# EAGLE board CT_schematic (EAGLE 7.6.0)

Size 100 x 80 mm. Coordinates in mm from the lower left corner, seen from the top.
Outline: 0,0 100,0 100,80 0,80 0,0
Copper layers (1*16): Top 0.035mm / dielectric 1.5mm / Bottom 0.035mm
Design rules "default": minimum track width 10mil, minimum drill 24mil, track to track 8mil, track to pad 8mil, pad to pad 8mil, via to via 8mil, smd to smd 8mil, copper to edge 40mil, drill to drill 8mil, minimum pad ring 10mil, minimum via ring 8mil, stop-mask expansion 4mil, vias tented up to drill 0mil, thermal gap 10mil

## Footprints (pad centres in the part's own frame; a part is rotated, then mirrored left to right if it is on the bottom)
C0603 = smd 0.8 x 0.8: 1 -0.762,0; 2 0.762,0
C0402 = smd 0.5 x 0.5: 1 -0.508,0; 2 0.508,0
C0805 = smd 1.2 x 1.3: 1 -1.016,0; 2 1.016,0
C1206 = smd 1.3 x 1.6: 1 -1.524,0; 2 1.524,0
L0603 = smd 0.8 x 0.8: 1 -0.762,0; 2 0.762,0
DR1040 = smd 1.6 x 3.2: 1 -4.458,0; 2 4.458,0
R0603 = smd 0.8 x 0.8: 1 -0.762,0; 2 0.762,0
UFBGA100 = smd 0.28 x 0.28: A1 -2.75,2.75; A2 -2.25,2.75; A3 -1.75,2.75; A4 -1.25,2.75; A5 -0.75,2.75; A6 -0.25,2.75; A7 0.25,2.75; A8 0.75,2.75; A9 1.25,2.75; A10 1.75,2.75; A11 2.25,2.75; A12 2.75,2.75; B1 -2.75,2.25; B2 -2.25,2.25; B3 -1.75,2.25; B4 -1.25,2.25; B5 -0.75,2.25; B6 -0.25,2.25; B7 0.25,2.25; B8 0.75,2.25; B9 1.25,2.25; B10 1.75,2.25; B11 2.25,2.25; B12 2.75,2.25; C1 -2.75,1.75; C2 -2.25,1.75; C3 -1.75,1.75; C4 -1.25,1.75; C5 -0.75,1.75; C8 0.75,1.75; C9 1.25,1.75; C10 1.75,1.75; C11 2.25,1.75; C12 2.75,1.75; D1 -2.75,1.25; D2 -2.25,1.25; D3 -1.75,1.25; D10 1.75,1.25; D11 2.25,1.25; D12 2.75,1.25; E1 -2.75,0.75; E2 -2.25,0.75; E3 -1.75,0.75; E10 1.75,0.75; E11 2.25,0.75; E12 2.75,0.75; F1 -2.75,0.25; F2 -2.25,0.25; F11 2.25,0.25; F12 2.75,0.25; G1 -2.75,-0.25; G2 -2.25,-0.25; G11 2.25,-0.25; G12 2.75,-0.25; H1 -2.75,-0.75; H2 -2.25,-0.75; H3 -1.75,-0.75; H10 1.75,-0.75; H11 2.25,-0.75; H12 2.75,-0.75; J1 -2.75,-1.25; J2 -2.25,-1.25; J3 -1.75,-1.25; J10 1.75,-1.25; J11 2.25,-1.25; J12 2.75,-1.25; K1 -2.75,-1.75; K2 -2.25,-1.75; K3 -1.75,-1.75; K4 -1.25,-1.75; K5 -0.75,-1.75; K8 0.75,-1.75; K9 1.25,-1.75; K10 1.75,-1.75; K11 2.25,-1.75; K12 2.75,-1.75; L1 -2.75,-2.25; L2 -2.25,-2.25; L3 -1.75,-2.25; L4 -1.25,-2.25; L5 -0.75,-2.25; L6 -0.25,-2.25; L7 0.25,-2.25; L8 0.75,-2.25; L9 1.25,-2.25; L10 1.75,-2.25; L11 2.25,-2.25; L12 2.75,-2.25; M1 -2.75,-2.75; M2 -2.25,-2.75; M3 -1.75,-2.75; M4 -1.25,-2.75; M5 -0.75,-2.75; M6 -0.25,-2.75; M7 0.25,-2.75; M8 0.75,-2.75; M9 1.25,-2.75; M10 1.75,-2.75; M11 2.25,-2.75; M12 2.75,-2.75
ETRX3587 = smd 1 x 1.4: 1 0,0; 2 1.27,0; 3 2.54,0; 4 3.81,0; 5 5.08,0; 6 6.35,0; 7 7.62,0; 8 8.89,0; 9 10.16,0; 10 11.43,0; 11 12.7,0; 12 13.97,0; 13 15.24,0; 14 16.51,0; 15 17.78,0; 16 19.05,0; 17 20.32,0; 18 21.59,0; 19 22.86,0; 20 22.86,18.8; 21 21.59,18.8; 22 20.32,18.8; 23 19.05,18.8; 24 17.78,18.8; 25 16.51,18.8; 26 15.24,18.8; 27 13.97,18.8; 28 12.7,18.8; 29 11.43,18.8; 30 10.16,18.8; 31 8.89,18.8; 32 7.62,18.8; 33 6.35,18.8
FCI_10118193-0001LF = smd 0.4 x 1.35: 1 -1.3,2.675; 2 -0.65,2.675; 3 0,2.675; 4 0.65,2.675; 5 1.3,2.675 | smd 1.6 x 1.4: 6 -3.2,2.45; 7 3.2,2.45 | smd 1.9 x 1.9: 8 -1.2,0; 9 1.2,0 | hole 0.5: -3.3,0; 3.3,0
SOT143B = smd 1 x 0.7: 1 -0.75,-1 | smd 0.6 x 0.7: 2 0.95,-1; 3 0.95,1; 4 -0.95,1
ABS07-32.768KHZ-7-T = smd 1.1 x 2.4: 1 -2.5,0; 2 0,0
ABLS-25.000MHZ-B2F-T = smd 5.6 x 2.8: 1 -3.81,0; 2 5.69,0
TSOT-23-5 = smd 1.3 x 0.62: 1 -1.31,0.95; 2 -1.31,0; 3 -1.31,-0.95; 4 1.31,-0.95; 5 1.31,0.95
DFN8_2X3MC = smd 0.813 x 0.305: 1 -1.398,0.75; 2 -1.398,0.25; 3 -1.398,-0.25; 4 -1.398,-0.75; 5 1.398,-0.75; 6 1.398,-0.25; 7 1.398,0.25; 8 1.398,0.75 | smd 1.753 x 1.549: 9 0,0
JST-2-SMD = smd 1 x 4.6: 1 -1,-3.7; 2 1,-3.7 | smd 1.6 x 3.4: NC1 -3.4,1.5; NC2 3.4,1.5
SON-6 = smd 0.55 x 0.3: 1 -0.355,0.5 | smd 0.52 x 0.3: 2 -0.37,0; 3 -0.37,-0.5; 4 0.37,-0.5; 5 0.37,0; 6 0.37,0.5
SW_4-1437565-2 = smd 1.4 x 2.1: 1 -2.23,4.55; 2 -2.23,-4.55; 3 2.23,4.55; 4 2.23,-4.55
LGM67K-G1J2-24-Z = smd 0.8 x 1.4: A -2,0; C 0,0
NC7SZ125M5X = smd 1.3 x 0.7: 1 -1.3,0.95; 2 -1.3,0; 3 -1.3,-0.95; 4 1.3,-0.95; 5 1.3,0.95
DUMMY_PACKAGE_117 = drill 0.3: 1 0,-1; 2 1.5,-1; 3 3,-1

## Placement (x,y rotation side)
C1  1e-06  [C0603]  -43.18,62.23 0 top  (outside the outline)
C2  1e-07  [C0603]  -46.99,62.23 0 top  (outside the outline)
C3  1e-07  [C0603]  -50.8,62.23 0 top  (outside the outline)
C4  1e-07  [C0603]  -54.61,62.23 0 top  (outside the outline)
C5  1e-07  [C0603]  -58.42,62.23 0 top  (outside the outline)
C6  4.7e-06  [C0603]  -39.37,62.23 0 top  (outside the outline)
C7  1e-07  [C0603]  -62.23,62.23 0 top  (outside the outline)
C8  1e-07  [C0603]  -66.04,62.23 0 top  (outside the outline)
C9  1e-07  [C0603]  -15.24,67.31 0 top  (outside the outline)
C10  1e-08  [C0603]  -19.05,67.31 0 top  (outside the outline)
C11  1e-06  [C0603]  -22.86,67.31 0 top  (outside the outline)
C12  1e-11  [C0402]  -45.72,67.31 0 top  (outside the outline)
C13  1e-11  [C0402]  -49.53,67.31 0 top  (outside the outline)
C14  1e-11  [C0402]  -53.34,67.31 0 top  (outside the outline)
C15  1e-11  [C0402]  -57.15,67.31 0 top  (outside the outline)
C16  1e-07  [C0402]  -60.96,67.31 0 top  (outside the outline)
C17  1e-05  [C0805]  -21.59,55.88 0 top  (outside the outline)
C18  1e-05  [C0805]  -26.67,55.88 0 top  (outside the outline)
C19  1e-07  [C0402]  -64.77,67.31 0 top  (outside the outline)
C20  1e-05  [C1206]  -48.26,49.53 0 top  (outside the outline)
C21  1e-05  [C1206]  -54.61,49.53 0 top  (outside the outline)
C22  1e-08  [C0402]  -15.24,72.39 0 top  (outside the outline)
C23  1e-08  [C0402]  -19.05,72.39 0 top  (outside the outline)
F1  240.0  [L0603]  -26.67,67.31 0 top  (outside the outline)
I1  3.8e-06  [DR1040]  -53.34,29.21 0 top  (outside the outline)
R2  1000.0  [R0603]  -30.48,67.31 0 top  (outside the outline)
R4  4700.0  [R0603]  -34.29,67.31 0 top  (outside the outline)
R5  4700.0  [R0603]  -38.1,67.31 0 top  (outside the outline)
R6  10000.0  [R0603]  -62.23,55.88 0 top  (outside the outline)
R7  10000.0  [R0603]  -15.24,62.23 0 top  (outside the outline)
R8  309473.68421053  [R0603]  -41.91,55.88 0 top  (outside the outline)
R9  1000000.0  [R0603]  -46.99,55.88 0 top  (outside the outline)
R10  10000.0  [R0603]  -20.32,62.23 0 top  (outside the outline)
R11  10000.0  [R0603]  -25.4,62.23 0 top  (outside the outline)
R12  18000.0  [R0603]  -30.48,62.23 0 top  (outside the outline)
R13  470000.0  [R0603]  -52.07,55.88 0 top  (outside the outline)
R14  120000.0  [R0603]  -57.15,55.88 0 top  (outside the outline)
R15  2000.0  [R0603]  -41.91,67.31 0 top  (outside the outline)
R16  10000.0  [R0603]  -35.56,62.23 0 top  (outside the outline)
U1  stm32f072vbh7  [UFBGA100]  -43.18,29.21 0 top  (outside the outline)
U2  ETRX3587  [ETRX3587]  -48.26,1.27 0 top  (outside the outline)
U3  10118193-0001LF  [FCI_10118193-0001LF]  -34.29,39.37 0 top  (outside the outline)
U4  prtr5v0u2ax  [SOT143B]  -31.75,72.39 0 top  (outside the outline)
U5  ABS07-32.768KHZ-7-T  [ABS07-32.768KHZ-7-T]  -27.94,49.53 0 top  (outside the outline)
U6  ABLS-25.000MHZ-B2F-T  [ABLS-25.000MHZ-B2F-T]  -53.34,39.37 0 top  (outside the outline)
U7  ltc3406es5  [TSOT-23-5]  -31.75,54.61 0 top  (outside the outline)
U8  MCP73831T-2ACI/MC  [DFN8_2X3MC]  -46.99,71.12 0 top  (outside the outline)
U9  S2B-PH-SM4-TB(LF)(SN)  [JST-2-SMD]  -22.86,41.91 0 top  (outside the outline)
U10  TPS3895ADRYR  [SON-6]  -40.64,71.12 0 top  (outside the outline)
U11  4-1437565-2  [SW_4-1437565-2]  -27.94,29.21 0 top  (outside the outline)
U12  Q65110A2395  [LGM67K-G1J2-24-Z]  -36.83,49.53 0 top  (outside the outline)
U13  nc7sz125m5x  [NC7SZ125M5X]  -59.69,48.26 0 top  (outside the outline)
U14  nc7sz125m5x  [NC7SZ125M5X]  -15.24,55.88 0 top  (outside the outline)
U15  Dummy  [DUMMY_PACKAGE_117]  -38.1,72.39 0 top  (outside the outline)

## Library data of the parts
C1-C23 F1 I1 R2 R4-R16 U1-U15 = circuit_tree

## Nets
CLK_CRYSTAL_U1_D1: C12.1 U1.D1 U5.1
CLK_CRYSTAL_U1_E1: C13.1 U1.E1 U5.2
CLK_CRYSTAL_U1_F1: C14.1 U1.F1 U6.1
CLK_CRYSTAL_U1_G1: C15.1 U1.G1 U6.2
GND: C1.2 C2.2 C3.2 C4.2 C5.2 C6.2 C7.2 C8.2 C9.2 C10.2 C11.2 C12.2 C13.2 C14.2 C15.2 C16.2 C17.2 C18.1 C18.2 C19.2 C20.2 C21.2 C22.2 C23.2 R2.2 R6.2 R7.2 R8.2 R12.2 R14.2 R15.2 U1.D3 U1.F11 U1.F12 U1.K1 U2.1 U2.13 U2.19 U2.20 U2.31 U2.33 U3.5 U3.6 U3.7 U3.8 U3.9 U4.1 U7.2 U8.6 U8.9 U9.2 U10.2 U12.C U13.1 U13.3 U14.1 U14.3 U15.1
INPUT_USBPOWER_5V: C20.1 R16.2 U3.1 U4.4 U8.1 U8.2
NET_U1_A4: R6.1 U1.A4
NET_U1_H2: R5.1 U1.H2 U14.4
NET_U1_M1: C10.1 C11.1 F1.1 U1.M1
NET_U1_M11: U12.A
NET_U1_M12: U11.3 U11.4
NET_U2_7: R4.1 U2.7 U13.4
NET_U2_21: R7.1 U2.21
NET_U7_1: U7.1
NET_U7_3: I1.1 U7.3
NET_U7_5: R8.1 R9.1 U7.5
NET_U7_ATNET_3: I1.2 R9.2
NET_U8_5: R16.1 U8.5
NET_U8_8: R15.1 U8.8
NET_U10_1: R11.1 R12.1 U10.1
NET_U10_3: R13.2 R14.1 U10.3
NET_U10_4: R10.1 U10.4 U13.2 U14.2
NET_U11_1: R2.1 U11.1 U11.2
PROC_PE1: U1.A2 U15.3
PROC_PE3: U1.A1 U15.2
PROC_USART2_CTS: U1.B8 U2.8
PROC_USART2_RTS: U1.B7 U2.6
PROC_USART2_RX: U1.A9 U2.17
PROC_USART2_TX: U1.A6 U2.18
PROC_USB_DM: U1.B12 U3.2 U4.3
PROC_USB_DP: U1.A12 U3.3 U4.2
VCC_S1_3V7: C17.1 C21.1 U7.4 U8.3 U8.4 U9.1
VCC_TIER1_2V5: C1.1 C2.1 C3.1 C4.1 C5.1 C6.1 C7.1 C8.1 C9.1 C16.1 C18.2 C19.1 C22.1 C23.1 F1.2 I1.2 R4.2 R5.2 R9.2 R10.2 R11.2 R13.1 U1.C4 U1.E2 U1.G11 U1.G12 U1.H3 U2.32 U10.6 U13.5 U14.5

## Tracks (layer width: path | path; a pad name or v marks a point on that pad's centre or on a via)
CLK_CRYSTAL_U1_D1  (2 unrouted)
CLK_CRYSTAL_U1_E1  (2 unrouted)
CLK_CRYSTAL_U1_F1  (2 unrouted)
CLK_CRYSTAL_U1_G1  (2 unrouted)
GND  (57 unrouted)
INPUT_USBPOWER_5V  (5 unrouted)
NET_U1_A4  (1 unrouted)
NET_U1_H2  (2 unrouted)
NET_U1_M1  (3 unrouted)
NET_U1_M12  (1 unrouted)
NET_U2_7  (2 unrouted)
NET_U2_21  (1 unrouted)
NET_U7_3  (1 unrouted)
NET_U7_5  (2 unrouted)
NET_U7_ATNET_3  (1 unrouted)
NET_U8_5  (1 unrouted)
NET_U8_8  (1 unrouted)
NET_U10_1  (2 unrouted)
NET_U10_3  (2 unrouted)
NET_U10_4  (3 unrouted)
NET_U11_1  (2 unrouted)
PROC_PE1  (1 unrouted)
PROC_PE3  (1 unrouted)
PROC_USART2_CTS  (1 unrouted)
PROC_USART2_RTS  (1 unrouted)
PROC_USART2_RX  (1 unrouted)
PROC_USART2_TX  (1 unrouted)
PROC_USB_DM  (2 unrouted)
PROC_USB_DP  (2 unrouted)
VCC_S1_3V7  (5 unrouted)
VCC_TIER1_2V5  (30 unrouted)